# Altium PCB PCB_BAT.pcbdoc (part 1 of 2)
Units mil, origin at the board's own origin, x right, y up, seen from the top; angles counter-clockwise.
Board outline 4353.96 x 2705.18 mil, 2 copper layers (Top Layer, Bottom Layer), stack 62.206 mil thick; 127 components, 83 nets, 401 pads, 369 vias.
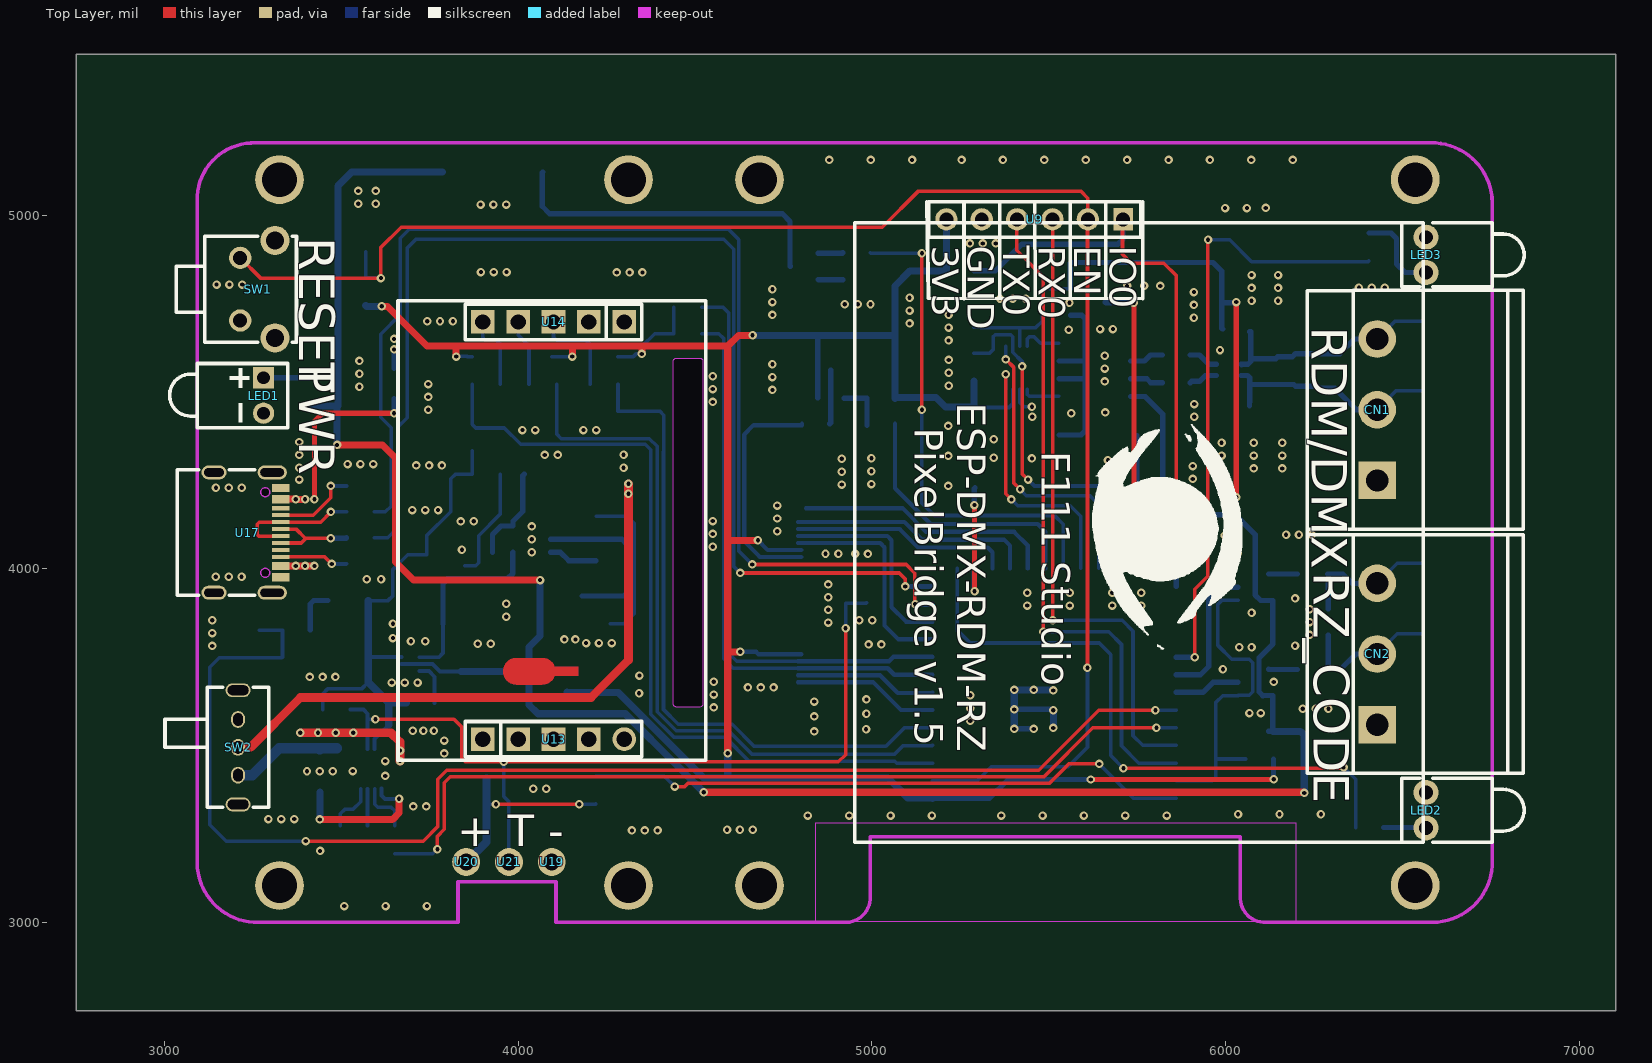
[diagram p0: Top Layer view]
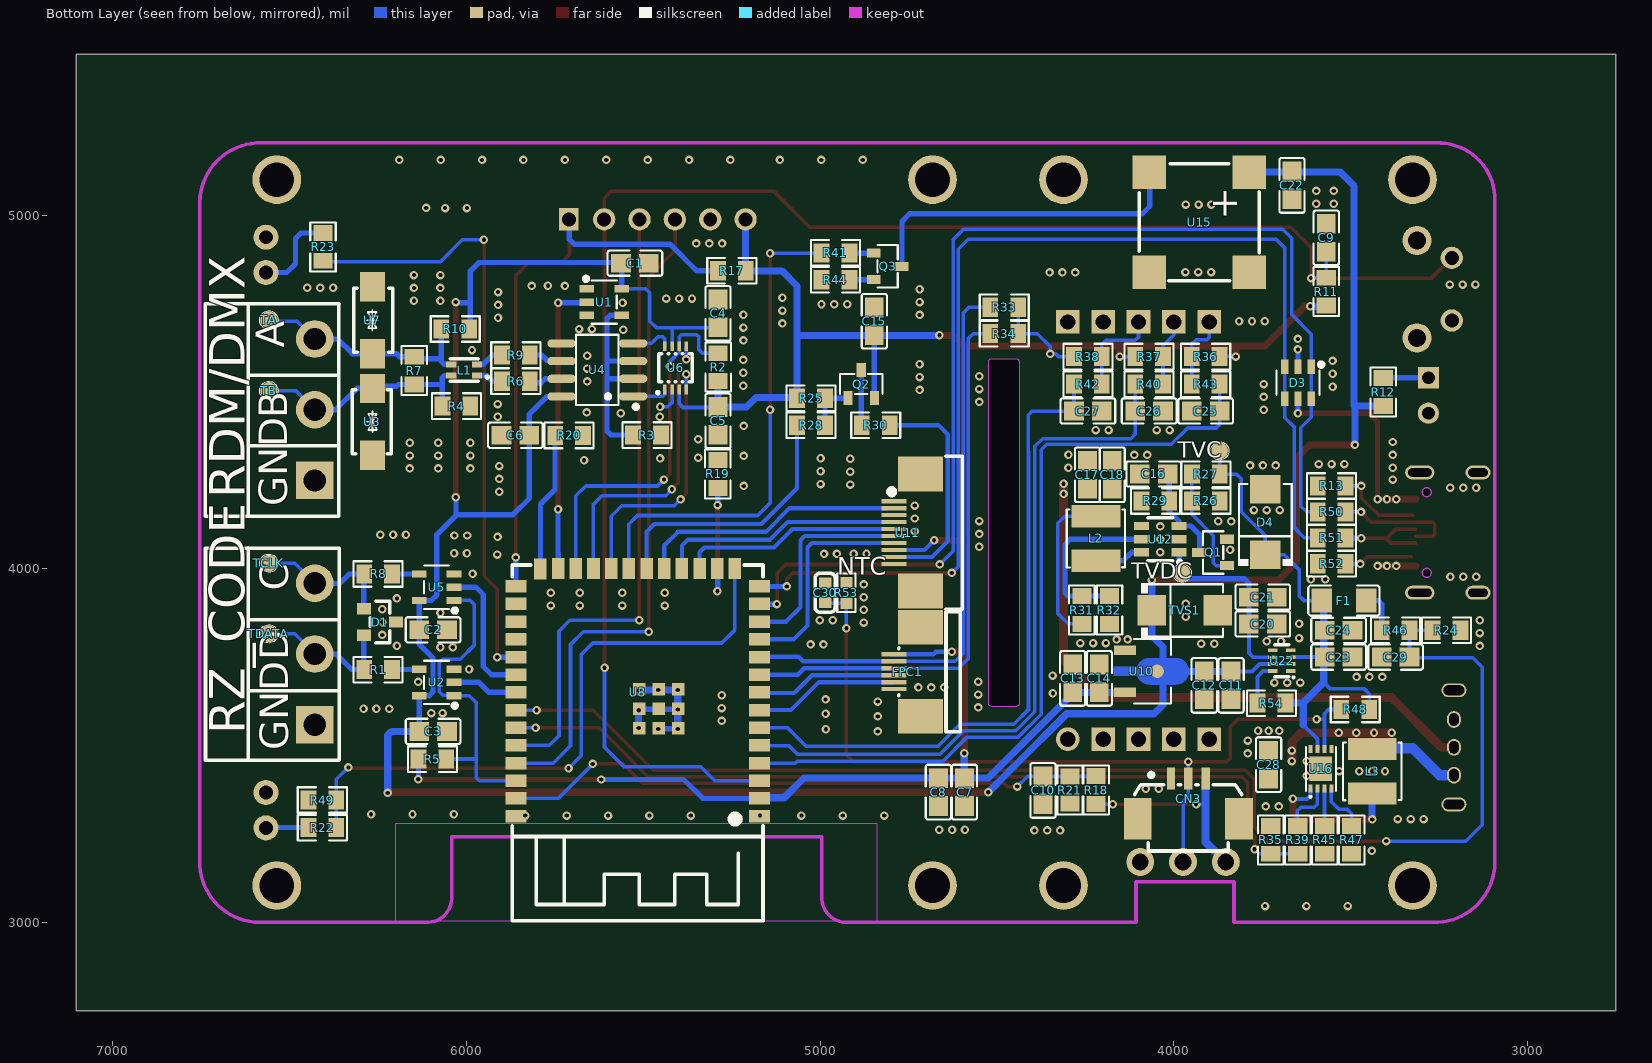
[diagram p1: Bottom Layer view, seen from below]

## Layer stack, top to bottom
Top Solder Mask Layer: solder mask 0.394, Dk 3.3
Top Layer: signal copper 1.379
Dielectric1: surface 59.449, FR4, Dk 4.5
Bottom Layer: signal copper 1.378
Bottom Solder Mask Layer: solder mask 0.394, Dk 3.3

## Board outline
7103.96,2750 2750,2750 2750,5455.18 7103.96,5455.18
cut-out: 4513.96,3610.27 ccw(c4513.96,3620.27) 4523.96,3620.27 4523.96,4584.53 ccw(c4513.96,4584.53) 4513.96,4594.53 4446.9,4594.53 ccw(c4446.9,4584.53) 4436.9,4584.53 4436.9,3620.27 ccw(c4446.9,3620.27) 4446.9,3610.27

## Design rules (kind name [scope] priority, off if disabled: settings)
BoardOutlineClearance copperThickness1oz [All] p0: genericclearance=10 ignorepadtopadclearanceinfootprint=FALSE except(0: Arc-SplitContinuation Track-SplitContinuation SMDPad-SplitContinuation THPad-SplitContinuation Via-SplitContinuation Fill-SplitContinuation Poly-SplitContinuation Region-SplitContinuation Text-SplitContinuation)
BoardOutlineClearance copperThickness2oz [All] p0: genericclearance=10 ignorepadtopadclearanceinfootprint=FALSE except(0: Arc-SplitContinuation Track-SplitContinuation SMDPad-SplitContinuation THPad-SplitContinuation Via-SplitContinuation Fill-SplitContinuation Poly-SplitContinuation Region-SplitContinuation Text-SplitContinuation)
BoardOutlineClearance otherClearance [All] p0: genericclearance=10 ignorepadtopadclearanceinfootprint=FALSE except(0: Arc-SplitContinuation Track-SplitContinuation SMDPad-SplitContinuation THPad-SplitContinuation Via-SplitContinuation Fill-SplitContinuation Poly-SplitContinuation Region-SplitContinuation Text-SplitContinuation)
Clearance copperThickness1oz [All] p1: gap=7 ignorepadtopadclearanceinfootprint=FALSE
Clearance copperThickness2oz [(InNet('VBAT'))] p1: gap=7 ignorepadtopadclearanceinfootprint=FALSE
Clearance otherClearance [All] p1: gap=7 ignorepadtopadclearanceinfootprint=FALSE
DiffPairsRouting differentialPair [All] p1: maxuncoupledlength=10 minlimit=6 maxlimit=Infinity mostfreqgap=6 toplayer_minwidth=5 toplayer_prefwidth=10 toplayer_maxwidth=100 bottomlayer_minwidth=5 bottomlayer_prefwidth=10 bottomlayer_maxwidth=100
PasteMaskExpansion pasteMaskExpansion [All] p1: expansion=0
PlaneConnect innerPlane [All] p1: planeconnectstyle=Relief reliefexpansion=20 reliefentries=4 reliefconductorwidth=10 reliefairgap=10
PolygonConnect copperRegion [All] p1: connectstyle=Relief reliefentries=4 reliefconductorwidth=10 polygonreliefangle="90 Angle" airgapwidth=10
PolygonConnect copperRegion1 [All] p1: connectstyle=Direct reliefentries=4 reliefconductorwidth=10 polygonreliefangle="90 Angle" airgapwidth=10
RoutingVias viaSize [All] p1: viastyle="Through Hole" holewidth=12.0078 minholewidth=11.811 maxholewidth=248.0314 width=12.0078 minwidth=11.811 maxwidth=248.0314
SolderMaskExpansion solderMaskExpansion [IsVia] p1: useseparateexpansions=TRUE expansion=-1000 expansionbottom=-1000
SolderMaskExpansion solderMaskExpansion [All] p2: useseparateexpansions=TRUE expansion=2 expansionbottom=2
Width copperThickness1oz [All] p1: maxlimit=100 minlimit=5 preferedwidth=10
Width copperThickness2oz [All] p1: maxlimit=100 minlimit=8 preferedwidth=10

## Components (designator, comment, footprint, x,y, rotation, side; value= is the part's Value field where it differs from the comment)
C1 "100nF" C0805 5523.87,4864.04 r0 bottom
C2 "100nF" C0805 6094.72,3827.28 r0 bottom
C3 "100nF" C0805 6094.72,3540.16 r0 bottom
C4 "100nF" C0805 5288.87,4722.04 r90 bottom
C5 "100nF" C0805 5288.87,4418.04 r90 bottom
C6 "100nF" C0805 5861.87,4377.51 r180 bottom
C7 "10uF" C0805 4591.77,3368.36 r90 bottom
C8 "100nF" C0805 4665.74,3368.36 r90 bottom
C9 "100nF" C0805 3568.87,4935.73 r270 bottom
C10 "100nF" C0805 4369.81,3373.04 r90 bottom
C11 "22uF" C0805 3837.87,3670.04 r90 bottom
C12 "100nF" C0805 3913.87,3670.04 r90 bottom
C13 "22uF" C0805 4285.87,3690.04 r270 bottom
C14 "100nF" C0805 4210.66,3689.98 r270 bottom
C15 "22uF" C0805 4846.87,4700.04 r270 bottom
C16 "100nF" C0805 4056.87,4268.04 r180 bottom
C17 "10uF" C0805 4244.23,4265.69 r90 bottom
C18 "22uF" C0805 4174.23,4265.69 r90 bottom
C20 "22uF" C0805 3748.23,3843.69 r180 bottom
C21 "22uF" C0805 3748.23,3919.69 r180 bottom
C22 "100nF" C0805 3665.87,5084.04 r90 bottom
C23 "10uF" C0805 3533.87,3750.04 r180 bottom
C24 "100nF" C0805 3533.87,3826.04 r0 bottom
C25 "10nF" C0805 3909.87,4446.04 r180 bottom
C26 "10nF" C0805 4069.87,4446.04 r0 bottom
C27 "10nF" C0805 4242.87,4446.04 r0 bottom
C28 "10uF" C0805 3731.87,3446.04 r90 bottom
C29 "100nF" C0805 3372.87,3750.04 r180 bottom
C30 "100nF" C0603 4985.87,3932.04 r270 bottom
CN1 "WJ2EDGRC-5.08-03P-14-00A" CONN-TH_3P-P5.08_WJ2EDGRC-5.08-3P 6428.96,4449.72 r90 top locked
CN2 "WJ2EDGRC-5.08-03P-14-00A" CONN-TH_3P-P5.08_WJ2EDGRC-5.08-3P 6428.96,3759.01 r90 top locked
CN3 "HCZZ0001-3" CONN-SMD_3P-P1.25_HCZZ0001-3 3958.87,3350.04 r180 bottom locked
D1 "PESD5V0S2BT,215" SOT-23_L2.9-W1.3-P1.90-LS2.4-BR 6245.32,3849.37 r0 bottom
D3 "USBLC6-2SC6" SOT-23-6_L2.9-W1.6-P0.95-LS2.8-BL 3648.87,4526.04 r0 bottom
D4 "SMBJ6.0A" SMB_L4.5-W3.7-LS5.4-RD 3740.87,4132.04 r90 bottom
F1 "1206L300SL16ARG" L1206 3518.87,3910.04 r180 bottom
FPC1 "05B20L06P" FPC-SMD_6P-P0.50_05B20L06P 4753.74,3708.82 r270 bottom
L1 "SMW2012B900DTE" FILTER-SMD_4P-L2.0-W1.2-BL 6006.87,4562.04 r90 bottom
L2 "2.2uH" IND-SMD_L4.0-W4.0 4220.23,4085.69 r90 bottom
L3 "2.2uH" IND-SMD_L4.0-W4.0 3439.14,3427.27 r270 bottom
LED1 "MHK1375CRBTD" LED-TH_MHK1375CRBTD 3279.83,4489.84 r270 top locked
LED2 "MHK1375CGBTD" LED-TH_MHK1375CGBTD 6567.51,3317.28 r90 top locked
LED3 "MHK1375CGBTD" LED-TH_MHK1375CGBTD 6567.51,4887.54 r90 top locked
Q1 "NTR4503NT1G" SOT-23-3_L2.9-W1.3-P1.90-LS2.4-BR 3888.87,4046.04 r180 bottom
Q2 "AO3401A" SOT-23-3_L2.9-W1.3-P1.90-LS2.4-BR 4883.87,4522.34 r270 bottom
Q3 "S8050" SOT-23-3_L2.9-W1.3-P1.90-LS2.4-BR 4809.09,4855.19 r0 bottom
R1 "33Ω" R0805 6249.99,3714.84 r180 bottom
R2 "10kΩ" R0805 5288.6,4570.2 r270 bottom
R3 "10kΩ" R0805 5489.87,4378.04 r180 bottom
R4 "1kΩ" R0805 6028.87,4460.04 r180 bottom
R5 "10kΩ" R0805 6096.72,3461.85 r0 bottom
R6 "0Ω" R0805 5860.73,4530.02 r180 bottom
R7 "120Ω" R0805 6147.86,4560.16 r270 bottom
R8 "33Ω" R0805 6249.99,3985.25 r180 bottom
R9 "0Ω" R0805 5860.73,4604.33 r180 bottom
R10 "1kΩ" R0805 6031.87,4678.04 r0 bottom
R11 "10kΩ" R0805 3568.87,4783.73 r270 bottom
R12 "5.1kΩ" R0805 3407.87,4499.83 r270 bottom
R13 "5.1kΩ" R0805 3553.87,4234.04 r0 bottom
R17 "10kΩ" R0805 5249.87,4842.57 r180 bottom
R18 "150kΩ" R0805 4219.59,3374.32 r270 bottom
R19 "10kΩ" R0805 5289.4,4268.04 r270 bottom
R20 "10kΩ" R0805 5709.87,4376.98 r0 bottom
R21 "100kΩ" R0805_NEW 4293.59,3374.32 r90 bottom
R22 "1kΩ" R0805 6407.87,3268.04 r180 bottom
R23 "1kΩ" R0805 6405.87,4910.04 r270 bottom
R24 "150kΩ" R0805 3228.87,3826.04 r0 bottom
R25 "100kΩ" R0805 5025.87,4482.04 r0 bottom
R26 "100kΩ" R0805 3909.23,4191.69 r180 bottom
R27 "10kΩ" R0805 3909.23,4267.69 r0 bottom
R28 "100Ω" R0805 5025.87,4406.04 r180 bottom
R29 "100kΩ" R0805 4052.23,4191.69 r180 bottom
R30 "33Ω" R0805 4842.87,4406.04 r0 bottom
R31 "150kΩ" R0805 4259.89,3883.35 r270 bottom
R32 "36kΩ" R0805 4181.89,3883.35 r90 bottom
R33 "4.7kΩ" R0805 4479.47,4739.63 r180 bottom
R34 "4.7kΩ" R0805 4479.47,4664.97 r180 bottom
R35 "33kΩ" R0805 3725.87,3233.27 r90 bottom
R36 "4.7kΩ" R0805 3909.87,4600.04 r180 bottom
R37 "4.7kΩ" R0805 4069.87,4600.04 r0 bottom
R38 "4.7kΩ" R0805 4242.87,4600.04 r0 bottom
R39 "22kΩ" R0805 3649.63,3233.27 r270 bottom
R40 "100Ω" R0805 4069.87,4522.04 r180 bottom
R41 "1kΩ" R0805 4956.78,4893.35 r180 bottom
R42 "100Ω" R0805 4242.87,4522.04 r0 bottom
R43 "100Ω" R0805 3909.87,4522.04 r0 bottom
R44 "100Ω" R0805 4956.78,4817.04 r180 bottom
R45 "0Ω" R0805 3573.38,3233.27 r270 bottom
R46 "100kΩ" R0805 3372.87,3826.04 r0 bottom
R47 "10kΩ" R0805 3497.14,3233.27 r270 bottom
R48 "15kΩ" R0805 3486.87,3602.04 r0 bottom
R49 "10kΩ" R0805 6407.87,3346.04 r180 bottom
R50 "0Ω" R0805 3553.87,4160.7 r0 bottom
R51 "0Ω" R0805 3553.87,4087.37 r180 bottom
R52 "5.1kΩ" R0805 3553.87,4014.04 r0 bottom
R53 "SDNT1608X103F3950FTF" R0603 4925.87,3931.84 r270 bottom
R54 "100kΩ" R0805 3723.87,3620.04 r180 bottom
SW1 "KH-6X6X6H-ZJ" SW-TH_KH-6X6X6H-ZJ-A 3263.1,4790.64 r270 top
SW2 "SK-12D02-G030" SW-TH_SK-12D02VG3 3207.87,3495.04 r270 top
TA "" 测试点 6561.87,4703.6 r180 bottom
TB "" 测试点 6561.87,4504.04 r180 bottom
TCLK "" 测试点 6561.87,4015.78 r180 bottom
TDATA "" 测试点 6561.87,3815.97 r180 bottom
TVC "" 测试点 3873.06,4333.41 r180 bottom
TVDC "" 测试点 3979.71,3987.97 r180 bottom
TVS1 "SMBJ5.0A" SMB_L4.6-W3.6-LS5.3-RD 3968.87,3882.04 r180 bottom
U1 "SN74AHCT1G125DBVR(UMW)" SOT-23-5_L3.0-W1.5-P0.95-LS2.8-BL 5610.87,4754.04 r270 bottom
U2 "SN74AHCT1G125DBVR(UMW)" SOT-23-5_L3.0-W1.5-P0.95-LS2.8-BL 6084.68,3678.7 r90 bottom
U3 "SMAJ12CA" SMA_L4.3-W2.7-LS5.1-BI 6266.48,4415.59 r90 bottom
U4 "THVD1450DR" SOIC-8_L4.9-W3.9-P1.27-LS6.0-BL 5630.33,4562.33 r90 bottom
U5 "SN74AHCT1G125DBVR(UMW)" SOT-23-5_L3.0-W1.5-P0.95-LS2.8-BL 6084.68,3947.75 r90 bottom
U6 "TXS0102DCUR" VSON8_L2.0-W2.3-P0.50-LS3.1-BL 5408.96,4568.19 r180 bottom
U7 "SMAJ12CA" SMA_L4.3-W2.7-LS5.1-BI 6266.32,4702.72 r270 bottom
U8 "2.4GHz" WIRELM-SMD_ESP32-S3-WROOM-1 5516.04,3650.59 r0 bottom locked
U9 "LAIL-PZ2.54-6P-L" CONN-TH_LAIL-PZ2.54-6P-L 5460.87,4988.04 r180 top
U10 "AP7365-33YRG-13" SOT-89-3_L4.5-W2.5-P1.50-LS4.2-BR 4084.87,3710.04 r0 bottom
U11 "HC-FPC-0.5-10P-CSH20" FPC-SMD_10P-P0.50_HC-FPC-0.5-10P-CSH20 4753.74,4102.4 r90 bottom
U12 "ETA1039S2G" SOT-23-6_L2.9-W1.6-P0.95-LS2.8-BR 4038.23,4083.69 r180 bottom
U13 "2541WV-05P" HDR-TH_5P-P2.54-V-M#1 4099.87,3518.04 r0 top locked
U14 "2541WV-05P" HDR-TH_5P-P2.54-V-M#2 4099.87,4698.04 r180 top locked
U15 "2.731kHz" BUZ-SMD_4P-L8.5-W8.5-P8.50-TL-A 3927.87,4980.04 r270 bottom
U16 "SGM41524YTDC8G/TR" DFN-8_L3.0-W2.0-P0.50-TL-EP-1 3584.02,3434.07 r90 bottom
U17 "GT-USB-7010ASV" USB-C-SMD_G-SWITCH_GT-USB-7010ASV 3234.27,4102.34 r270 top
U19 "电池焊盘" 电池焊盘 4094.87,3170.8 r0 top
U20 "电池焊盘" 电池焊盘 3852.87,3170.8 r0 top
U21 "电池焊盘" 电池焊盘 3973.87,3170.8 r0 top
U22 "LM66200DRLR" SOT-583-8_L2.1-W1.2-P0.50-LS1.6-BL 3694.87,3740.04 r90 bottom

## Footprints (in the part's own frame and the unit in brackets; to place one, negate y for a bottom-side part, rotate by r counter-clockwise, add the part's x,y. Pads: shape width x height; smd on the part's side, far side on the other; paste and mask are expansions set on the pad)
BUZ-SMD_4P-L8.5-W8.5-P8.50-TL-A [mil]
  rect 94.49x94.49 smd: 1(-141.73,141.72) 2(-141.73,-141.72) 3(141.72,-141.72) 4(141.73,141.72)
  silkscreen extent -165,-169 165,169
C0603 [mm]
  rect 0.8x0.9 smd: 1(-0.7,0) 2(0.7,0)
  silkscreen extent -1.39,-0.71 1.39,0.71
C0805 [mm]
  rect 1.41x1.35 smd paste-100 mask+0.051: 1(-1,0) 2(1,0)
  silkscreen extent -1.96,-0.9 1.96,0.9
CONN-SMD_3P-P1.25_HCZZ0001-3 [mm]
  rect 0.6x1.6 smd paste+0 mask+0.05: 1(-1.25,1.45) 2(0,1.45) 3(1.25,1.45)
  rect 2x3 smd paste+0 mask+0.05: 4(3.63,-1.45) 5(-3.63,-1.45)
  silkscreen extent -3.87,-3.76 3.84,1.85
CONN-TH_3P-P5.08_WJ2EDGRC-5.08-3P [mm]
  rect 2.7x2.7 hole 1.6: 1(-5.08,0)
  round 2.7 hole 1.6: 2(0,0) 3(5.08,0)
  silkscreen extent -8.57,-10.5 8.57,1.7
CONN-TH_LAIL-PZ2.54-6P-L [mm]
  rect 1.4x1.6 hole 1 paste+0 mask+0.05: 1(-6.35,0)
  round 1.6 hole 1 paste+0 mask+0.05: 2(-3.81,0) 3(-1.27,0) 4(1.27,0) 5(3.81,0) 6(6.35,0)
  silkscreen extent -7.62,-1.27 7.62,1.27
DFN-8_L3.0-W2.0-P0.50-TL-EP-1 [mm]
  rect 0.585x0.28 smd: 1(-1.418,0.75) 2(-1.418,0.25) 3(-1.418,-0.25) 4(-1.418,-0.75) 5(1.418,-0.75) 6(1.418,-0.25) 7(1.418,0.25) 8(1.418,0.75)
  rect 1.75x1.63 smd: 9(0,0)
  silkscreen extent -2.08,-1.08 1.58,1.08
FILTER-SMD_4P-L2.0-W1.2-BL [mm]
  rect 0.448x0.75 smd: 1(-0.4,-0.925) 2(0.4,-0.925) 3(0.4,0.925) 4(-0.4,0.925)
  silkscreen extent -0.8,-1.75 0.8,1
FPC-SMD_6P-P0.50_05B20L06P [mm]
  rect 0.3x1.8 smd paste+0 mask+0.05: 1(-1.25,-0.95) 2(-0.75,-0.95) 3(-0.25,-0.95) 4(0.25,-0.95) 5(0.75,-0.95) 6(1.25,-0.95)
  rect 2.5x3.2 smd paste+0 mask+0.05: 7(-3.2,0.95) 8(3.2,0.95)
  silkscreen extent -4.3,-0.6 4.3,3.8
FPC-SMD_10P-P0.50_HC-FPC-0.5-10P-CSH20 [mm]
  rect 0.3x1.8 smd paste+0 mask+0.05: 1(2.25,0.95) 2(1.75,0.95) 3(1.25,0.95) 4(0.75,0.95) 5(0.25,0.95) 6(-0.25,0.95) 7(-0.75,0.95) 8(-1.25,0.95) 9(-1.75,0.95) 10(-2.25,0.95)
  rect 2.5x3.2 smd paste+0 mask+0.05: 11(-4.2,-0.95) 12(4.2,-0.95)
  silkscreen extent -5.49,-3.94 5.49,1.32
HDR-TH_5P-P2.54-V-M#1 [mm]
  rect 1.7x1.7 hole 1.1: 1(-5.08,0) 2(-2.54,0) 3(0,0) 4(2.54,0)
  round 1.7 hole 1.1: 5(5.08,0)
  silkscreen extent -6.35,-1.27 6.35,1.27
HDR-TH_5P-P2.54-V-M#2 [mm]
  rect 1.7x1.7 hole 1.1: 1(-5.08,0) 2(-2.54,0) 3(0,0) 4(2.54,0) 5(5.08,0)
  silkscreen extent -6.35,-1.27 6.35,1.27
IND-SMD_L4.0-W4.0 [mm]
  rect 1.6x3.5 smd: 1(-1.6,0) 2(1.6,0)
  silkscreen extent -2.08,-2.1 2.08,2.1
L1206 [mm]
  rect 1.485x1.728 smd paste-100 mask+0.051: 1(-1.593,0) 2(1.593,0)
  silkscreen extent -2.56,-1.09 2.56,1.09
LED-TH_MHK1375CGBTD [mm]
  round 1.8 hole 1: 1(-1.27,0) 2(1.27,0)
  silkscreen extent -2.3,-7.04 2.3,1.75
LED-TH_MHK1375CRBTD [mil]
  rect 60x60 hole 36 paste+0 mask+1.97: 1(-50,0)
  round 60 hole 36 paste+0 mask+1.97: 2(50,0)
  silkscreen extent -91,-266 91,69
R0603 [mil]
  rect 31.75x34.02 smd paste-3937.01 mask+2: 1(-29.66,0) 2(29.66,0)
  silkscreen extent -55,-26 55,26
R0805 [mm]
  rect 1.133x1.377 smd paste-100 mask+0.051: 1(-1,0) 2(1,0)
  silkscreen extent -1.76,-0.92 1.76,0.92
R0805_NEW [mil]
  rect 44.59x54.21 smd paste-3937.01 mask+2: 1(-38.04,0) 2(38.04,0)
  silkscreen extent -69,-36 69,36
SMA_L4.3-W2.7-LS5.1-BI [mm]
  rect 2.1x1.8 smd: 1(-2.4,0) 2(2.4,0)
  silkscreen extent -2.3,-1.35 2.3,1.45
SMB_L4.5-W3.7-LS5.4-RD [mil]
  rect 80.61x86.31 smd: 1(-92.94,0) 2(92.94,0)
  silkscreen extent -123,-77 108,77
SMB_L4.6-W3.6-LS5.3-RD [mil]
  rect 80.61x86.31 smd: 1(-92.94,0) 2(92.94,0)
  silkscreen extent -123,-77 108,77
SOIC-8_L4.9-W3.9-P1.27-LS6.0-BL [mm]
  oval 0.588x2.045 smd: 1(-1.905,-2.57) 2(-0.635,-2.57) 3(0.635,-2.57) 4(1.905,-2.57) 5(1.905,2.57) 6(0.635,2.57) 7(-0.635,2.57) 8(-1.905,2.57)
  silkscreen extent -2.8,-2.92 2.53,1.52
SOT-23-3_L2.9-W1.3-P1.90-LS2.4-BR [mm]
  rect 1x0.65 smd: 1(1,-0.95) 2(1,0.95) 3(-1,0)
  silkscreen extent -0.73,-1.53 0.73,1.53
SOT-23-5_L3.0-W1.5-P0.95-LS2.8-BL [mm]
  rect 0.532x1.045 smd: 1(-0.95,-1.25) 2(0,-1.25) 3(0.95,-1.25) 4(0.95,1.25) 5(-0.95,1.25)
  silkscreen extent -1.82,-1.45 1.55,0.9
SOT-23-6_L2.9-W1.6-P0.95-LS2.8-BL [mil]
  rect 20.95x42.2 smd: 1(-37.4,-45.24) 2(0,-45.24) 3(37.4,-45.24) 4(37.4,45.24) 5(0,45.24) 6(-37.4,45.24)
  silkscreen extent -72,-57 61,35
SOT-23-6_L2.9-W1.6-P0.95-LS2.8-BR [mm]
  rect 1.1x0.6 smd paste+0 mask+0.051: 1(1.35,-0.95) 2(1.35,0) 3(1.35,0.95) 4(-1.35,0.95) 5(-1.35,0) 6(-1.35,-0.95)
  silkscreen extent -0.9,-1.78 1.52,1.55
SOT-23_L2.9-W1.3-P1.90-LS2.4-BR [mm]
  rect 1x0.8 smd: 1(1.15,-0.95) 2(1.15,0.95) 3(-1.15,0)
  silkscreen extent -0.7,-1.5 0.7,1.5
SOT-89-3_L4.5-W2.5-P1.50-LS4.2-BR [mm]
  rect 1.575x0.672 smd: 1(1.356,-1.5) 3(1.356,1.5)
  round 0.95 smd: 2(-0.966,0)
  Top Layer region: -2.283,0.95 -0.429,0.95 -0.384,0.949 -0.34,0.946 -0.296,0.94 -0.252,0.933 -0.208,0.924 -0.165,0.912 -0.123,0.899 -0.081,0.884 -0.04,0.866 0,0.847 0.04,0.826 0.078,0.803 0.115,0.779 0.151,0.752 0.185,0.724 0.219,0.695 0.251,0.664 0.281,0.631 0.31,0.597 0.337,0.562 0.362,0.525 0.386,0.488 0.408,0.449 0.428,0.409 0.447,0.33 2.144,0.33 2.144,-0.33 0.447,-0.33 0.428,-0.409 0.408,-0.449 0.386,-0.488 0.362,-0.526 0.337,-0.562 0.31,-0.597 0.281,-0.631 0.251,-0.664 0.219,-0.695 0.185,-0.725 0.151,-0.753 0.115,-0.779 0.078,-0.804 0.04,-0.827 0,-0.848 -0.04,-0.867 -0.081,-0.884 -0.123,-0.899 -0.165,-0.913 -0.208,-0.924 -0.252,-0.934 -0.296,-0.941 -0.34,-0.946 -0.384,-0.949 -0.429,-0.95 -2.283,-0.95 -2.328,-0.949 -2.372,-0.946 -2.416,-0.941 -2.46,-0.934 -2.504,-0.924 -2.547,-0.913 -2.589,-0.899 -2.631,-0.884 -2.672,-0.867 -2.713,-0.848 -2.752,-0.827 -2.79,-0.804 -2.827,-0.779 -2.863,-0.753 -2.898,-0.725 -2.931,-0.695 -2.963,-0.664 -2.993,-0.631 -3.022,-0.597 -3.049,-0.562 -3.075,-0.526 -3.098,-0.488 -3.12,-0.449 -3.141,-0.409 -3.159,-0.369 -3.175,-0.327 -3.189,-0.285 -3.202,-0.242 -3.212,-0.199 -3.22,-0.155 -3.227,-0.111 -3.231,-0.067 -3.233,-0.022 -3.233,0.022 -3.231,0.067 -3.227,0.111 -3.22,0.155 -3.212,0.199 -3.202,0.242 -3.189,0.285 -3.175,0.327 -3.159,0.369 -3.141,0.409 -3.12,0.449 -3.098,0.488 -3.075,0.525 -3.049,0.562 -3.022,0.597 -2.993,0.631 -2.963,0.664 -2.931,0.695 -2.898,0.724 -2.863,0.752 -2.827,0.779 -2.79,0.803 -2.752,0.826 -2.713,0.847 -2.672,0.866 -2.631,0.884 -2.589,0.899 -2.547,0.912 -2.504,0.924 -2.46,0.933 -2.416,0.94 -2.372,0.946 -2.328,0.949
  Bottom Layer region: -2.283,0.95 -0.429,0.95 -0.384,0.949 -0.34,0.946 -0.296,0.94 -0.252,0.933 -0.208,0.924 -0.165,0.912 -0.123,0.899 -0.081,0.884 -0.04,0.866 0,0.847 0.04,0.826 0.078,0.803 0.115,0.779 0.151,0.752 0.185,0.724 0.219,0.695 0.251,0.664 0.281,0.631 0.31,0.597 0.337,0.562 0.362,0.525 0.386,0.488 0.408,0.449 0.428,0.409 0.447,0.33 2.144,0.33 2.144,-0.33 0.447,-0.33 0.428,-0.409 0.408,-0.449 0.386,-0.488 0.362,-0.526 0.337,-0.562 0.31,-0.597 0.281,-0.631 0.251,-0.664 0.219,-0.695 0.185,-0.725 0.151,-0.753 0.115,-0.779 0.078,-0.804 0.04,-0.827 0,-0.848 -0.04,-0.867 -0.081,-0.884 -0.123,-0.899 -0.165,-0.913 -0.208,-0.924 -0.252,-0.934 -0.296,-0.941 -0.34,-0.946 -0.384,-0.949 -0.429,-0.95 -2.283,-0.95 -2.328,-0.949 -2.372,-0.946 -2.416,-0.941 -2.46,-0.934 -2.504,-0.924 -2.547,-0.913 -2.589,-0.899 -2.631,-0.884 -2.672,-0.867 -2.713,-0.848 -2.752,-0.827 -2.79,-0.804 -2.827,-0.779 -2.863,-0.753 -2.898,-0.725 -2.931,-0.695 -2.963,-0.664 -2.993,-0.631 -3.022,-0.597 -3.049,-0.562 -3.075,-0.526 -3.098,-0.488 -3.12,-0.449 -3.141,-0.409 -3.159,-0.369 -3.175,-0.327 -3.189,-0.285 -3.202,-0.242 -3.212,-0.199 -3.22,-0.155 -3.227,-0.111 -3.231,-0.067 -3.233,-0.022 -3.233,0.022 -3.231,0.067 -3.227,0.111 -3.22,0.155 -3.212,0.199 -3.202,0.242 -3.189,0.285 -3.175,0.327 -3.159,0.369 -3.141,0.409 -3.12,0.449 -3.098,0.488 -3.075,0.525 -3.049,0.562 -3.022,0.597 -2.993,0.631 -2.963,0.664 -2.931,0.695 -2.898,0.724 -2.863,0.752 -2.827,0.779 -2.79,0.803 -2.752,0.826 -2.713,0.847 -2.672,0.866 -2.631,0.884 -2.589,0.899 -2.547,0.912 -2.504,0.924 -2.46,0.933 -2.416,0.94 -2.372,0.946 -2.328,0.949
  Multi-Layer region: -2.283,0.95 -0.429,0.95 -0.384,0.949 -0.34,0.946 -0.296,0.94 -0.252,0.933 -0.208,0.924 -0.165,0.912 -0.123,0.899 -0.081,0.884 -0.04,0.866 0,0.847 0.04,0.826 0.078,0.803 0.115,0.779 0.151,0.752 0.185,0.724 0.219,0.695 0.251,0.664 0.281,0.631 0.31,0.597 0.337,0.562 0.362,0.525 0.386,0.488 0.408,0.449 0.428,0.409 0.447,0.33 2.144,0.33 2.144,-0.33 0.447,-0.33 0.428,-0.409 0.408,-0.449 0.386,-0.488 0.362,-0.526 0.337,-0.562 0.31,-0.597 0.281,-0.631 0.251,-0.664 0.219,-0.695 0.185,-0.725 0.151,-0.753 0.115,-0.779 0.078,-0.804 0.04,-0.827 0,-0.848 -0.04,-0.867 -0.081,-0.884 -0.123,-0.899 -0.165,-0.913 -0.208,-0.924 -0.252,-0.934 -0.296,-0.941 -0.34,-0.946 -0.384,-0.949 -0.429,-0.95 -2.283,-0.95 -2.328,-0.949 -2.372,-0.946 -2.416,-0.941 -2.46,-0.934 -2.504,-0.924 -2.547,-0.913 -2.589,-0.899 -2.631,-0.884 -2.672,-0.867 -2.713,-0.848 -2.752,-0.827 -2.79,-0.804 -2.827,-0.779 -2.863,-0.753 -2.898,-0.725 -2.931,-0.695 -2.963,-0.664 -2.993,-0.631 -3.022,-0.597 -3.049,-0.562 -3.075,-0.526 -3.098,-0.488 -3.12,-0.449 -3.141,-0.409 -3.159,-0.369 -3.175,-0.327 -3.189,-0.285 -3.202,-0.242 -3.212,-0.199 -3.22,-0.155 -3.227,-0.111 -3.231,-0.067 -3.233,-0.022 -3.233,0.022 -3.231,0.067 -3.227,0.111 -3.22,0.155 -3.212,0.199 -3.202,0.242 -3.189,0.285 -3.175,0.327 -3.159,0.369 -3.141,0.409 -3.12,0.449 -3.098,0.488 -3.075,0.525 -3.049,0.562 -3.022,0.597 -2.993,0.631 -2.963,0.664 -2.931,0.695 -2.898,0.724 -2.863,0.752 -2.827,0.779 -2.79,0.803 -2.752,0.826 -2.713,0.847 -2.672,0.866 -2.631,0.884 -2.589,0.899 -2.547,0.912 -2.504,0.924 -2.46,0.933 -2.416,0.94 -2.372,0.946 -2.328,0.949
  silkscreen extent -1.95,-2.33 0.7,2.33
SOT-583-8_L2.1-W1.2-P0.50-LS1.6-BL [mm]
  rect 0.28x0.68 smd: 1(-0.75,-0.64) 2(-0.25,-0.64) 3(0.25,-0.64) 4(0.75,-0.64) 5(0.75,0.64) 6(0.25,0.64) 7(-0.25,0.64) 8(-0.75,0.64)
  silkscreen extent -1.27,-0.93 1.14,0.51
SW-TH_KH-6X6X6H-ZJ-A [mm]
  round 1.6 hole 1 paste+0 mask+0.05: 1(-2.25,-1.25) 2(2.25,-1.25)
  round 2.1 hole 1.3 copper offset 0,0 paste+0 mask+0.05: 3(-3.5,1.25) 4(3.5,1.25)
  silkscreen extent -3.81,-5.84 3.81,2.79
SW-TH_SK-12D02VG3 [mm]
  oval 1.2x1 hole 0.7 slot 0.9 at 0 deg copper offset 0.001,0 paste+0 mask+0.051: 1(-2,0)
  oval 1.2x1 hole 0.7 slot 0.9 at 0 deg paste+0 mask+0.051: 2(0,0)
  oval 1.2x1 hole 0.7 slot 0.9 at 0 deg copper offset -0.001,0 paste+0 mask+0.051: 3(2,0)
  oval 1x1.8 hole 0.7 slot 1.5 at 90 deg copper offset 0,0 paste+0 mask+0.051: 4(4.1,0) 5(-4.1,0)
  silkscreen extent -4.3,-5.25 4.3,2.2
USB-C-SMD_G-SWITCH_GT-USB-7010ASV [mm]
  oval 1x2.1 hole 0.6 slot 1.7 at 90 deg paste+0 mask+0.05: 1(-4.32,1.78) 2(4.32,1.78)
  oval 1x1.8 hole 0.6 slot 1.4 at 90 deg paste+0 mask+0.05: 3(4.32,-2.4) 4(-4.32,-2.4)
  rect 0.6x1.24 smd paste-100 mask+0.05: A1B12(-3.2,2.4) A4B9(-2.4,2.4) B1A12(3.2,2.4) B4A9(2.4,2.4)
  rect 0.3x1.24 smd paste-100 mask+0.05: A5(-1.25,2.4) A6(-0.25,2.4) A7(0.25,2.4) A8(1.25,2.4) B5(1.75,2.4) B6(0.75,2.4) B7(-0.75,2.4) B8(-1.75,2.4)
  Board Outline Layer circle w0.003: c2.89,1.28 r0.325
  Board Outline Layer circle w0.003: c-2.9,1.28 r0.325
  Board Outline Layer region: 2.89,1.605 3.031,1.573 3.144,1.483 3.207,1.352 3.207,1.208 3.144,1.078 3.031,0.987 2.89,0.955 2.89,0.955 2.749,0.987 2.636,1.078 2.573,1.208 2.573,1.352 2.636,1.483 2.749,1.573 2.89,1.605
  Board Outline Layer region: 2.89,1.605 2.968,1.596 3.041,1.568 3.105,1.523 3.157,1.465 3.194,1.395 3.213,1.319 3.213,1.241 3.194,1.165 3.157,1.096 3.105,1.037 3.041,0.992 2.968,0.965 2.89,0.955 2.812,0.965 2.739,0.992 2.674,1.037 2.623,1.096 2.586,1.165 2.567,1.241 2.567,1.319 2.586,1.395 2.623,1.465 2.674,1.523 2.739,1.568 2.812,1.596
  Board Outline Layer region: -2.9,1.605 -2.759,1.573 -2.646,1.483 -2.583,1.352 -2.583,1.208 -2.646,1.078 -2.759,0.987 -2.9,0.955 -2.9,0.955 -3.041,0.987 -3.154,1.078 -3.217,1.208 -3.217,1.352 -3.154,1.483 -3.041,1.573 -2.9,1.605
  Board Outline Layer region: -2.9,1.605 -2.822,1.596 -2.749,1.568 -2.684,1.523 -2.632,1.465 -2.596,1.395 -2.577,1.319 -2.577,1.241 -2.596,1.165 -2.632,1.096 -2.684,1.037 -2.749,0.992 -2.822,0.965 -2.9,0.955 -2.978,0.965 -3.051,0.992 -3.115,1.037 -3.167,1.096 -3.204,1.165 -3.223,1.241 -3.223,1.319 -3.204,1.395 -3.167,1.465 -3.115,1.523 -3.051,1.568 -2.978,1.596
  Multi-Layer board cut-out: 2.89,1.605 3.031,1.573 3.144,1.483 3.207,1.352 3.207,1.208 3.144,1.078 3.031,0.987 2.89,0.955 2.89,0.955 2.749,0.987 2.636,1.078 2.573,1.208 2.573,1.352 2.636,1.483 2.749,1.573 2.89,1.605
  Multi-Layer board cut-out: -2.9,1.605 -2.759,1.573 -2.646,1.483 -2.583,1.352 -2.583,1.208 -2.646,1.078 -2.759,0.987 -2.9,0.955 -2.9,0.955 -3.041,0.987 -3.154,1.078 -3.217,1.208 -3.217,1.352 -3.154,1.483 -3.041,1.573 -2.9,1.605
  silkscreen extent -4.5,-5.03 4.5,0.52
VSON8_L2.0-W2.3-P0.50-LS3.1-BL [mil]
  rect 9.84x27.56 smd: 1(-30,-61.02) 2(-10,-61.02) 3(10,-61.02) 4(30,-61.02) 5(30,61.03) 6(10,61.03) 7(-10,61.03) 8(-30,61.03)
  silkscreen extent -54,-74 47,39
WIRELM-SMD_ESP32-S3-WROOM-1 [mm]
  rect 1.5x0.9 smd paste+0 mask+0.05: 1(-8.75,8.895) 2(-8.75,7.625) 3(-8.75,6.355) 4(-8.75,5.085) 5(-8.75,3.815) 6(-8.75,2.545) 7(-8.75,1.275) 8(-8.75,0.005) 9(-8.75,-1.265) 10(-8.75,-2.535) 11(-8.75,-3.805) 12(-8.75,-5.075) 13(-8.75,-6.345) 14(-8.75,-7.615) 27(8.75,-7.615) 28(8.75,-6.345) 29(8.75,-5.075) 30(8.75,-3.805) 31(8.75,-2.535) 32(8.75,-1.265) 33(8.75,0.005) 34(8.75,1.275) 35(8.75,2.545) 36(8.75,3.815) 37(8.75,5.085) 38(8.75,6.355) 39(8.75,7.625) 40(8.75,8.895)
  rect 0.9x1.5 smd paste+0 mask+0.05: 15(-6.985,-8.895) 16(-5.715,-8.895) 17(-4.445,-8.895) 18(-3.175,-8.895) 19(-1.905,-8.895) 20(-0.635,-8.895) 21(0.635,-8.895) 22(1.905,-8.895) 23(3.175,-8.895) 24(4.445,-8.895) 25(5.715,-8.895) 26(6.985,-8.865)
  rect 0.9x0.9 smd: 41(-2.9,-0.225) 41(-2.9,1.175) 41(-2.9,2.575) 41(-1.5,-0.225) 41(-1.5,1.175) 41(-1.5,2.575) 41(-0.1,-0.225) 41(-0.1,1.175) 41(-0.1,2.575)
  silkscreen extent -9,-9.14 9.02,16.39
测试点 [mm]
  round 1.2 smd paste+0 mask+0.051: 1(0.069,-0.001)
  silkscreen extent -0.59,-0.66 0.73,0.66
电池焊盘 [mm]
  round 2 hole 1.2 paste+0 mask+0.051: 1(0,0)

## Free pads (board coordinates)
  round 137.8 hole 98.43: 1(3324.79,3104.45) 1(3324.79,5100.31) 1(4311.87,3104.45) 1(4311.87,5100.31) 1(4682.11,3104.45) 1(4682.11,5100.31) 1(6536.64,3104.45) 1(6536.64,5100.31)

## Via types
v1: diameter 24.02, hole 12, Top Layer to Bottom Layer, 369 vias

## Nets (pads, with @x,y where several pads share a name; then routed paths per layer and width w, separated by ;. In a path a pad name is that pad's centre, name@x,y a point inside that pad or via, vN(x,y) a via of type N, cw(c..) or ccw(c..) an arc to the next point about the centre after c; other vN are vias at no path point)
$1N61: CN1.3 L1.3 R7.1 R10.2 TA.1 U7.2 | length 651.2
  Bottom Layer w10: CN1.3@6428.96,4649.72 6479.28,4700.04 6555.65,4700.04 TA.1@6559.15,4703.55
  Bottom Layer w15: L1.3@6044.76,4577.93 6045.49,4577.19 6046.23,4577.93 6062.87,4577.93 6071.76,4586.82 6071.76,4592.93 ; R10.2@6068.24,4670.04 6071.76,4670.04 6071.76,4592.93 ; CN1.3@6428.96,4649.72 6364.56,4649.72 6323.06,4608.23 U7.2@6266.32,4608.23 6198.06,4608.23 6189.36,4599.53 R7.1@6147.86,4599.53 6142.37,4594.04 6072.87,4594.04 6071.76,4592.93
$1N69: R3.1 U1.4 U4.2 U4.3 | length 589.8
  Bottom Layer w15: U4.2@5529.15,4537.33 5601.8,4537.33 5602.87,4536.26 ; U4.3@5529.15,4587.33 5602.87,4587.33 ; R3.1@5529.24,4378.04 5591.87,4378.04 5602.87,4389.04 5602.87,4536.26 ; U1.4@5561.66,4716.64 5594.27,4716.64 5602.87,4708.04 5602.87,4587.33 ; 5602.87,4536.26 5602.87,4587.33
$1N71: CN1.2 L1.4 R4.1 R7.2 TB.1 U3.2 | length 649.2
  Bottom Layer w10: CN1.2@6428.96,4449.72 6483.23,4503.99 TB.1@6559.15,4503.99
  Bottom Layer w15: L1.4@6044.78,4546.4 6062.51,4546.4 6068.51,4540.4 6068.51,4520.79 ; R4.1@6068.24,4460.04 6068.24,4471.29 6068.51,4471.56 6068.51,4520.79 ; CN1.2@6428.96,4449.72 6370.19,4449.72 6309.83,4510.08 U3.2@6266.48,4510.08 6260.52,4516.04 6197.87,4516.04 6193.12,4520.79 R7.2@6147.86,4520.79 6068.51,4520.79
$1N81: R1.2 U2.4 | length 81.3
  Bottom Layer w15: U2.4@6121.89,3716.1 6123.15,3714.84 R1.2@6202.62,3714.84
$1N82: R8.2 U5.4 | length 80.8
  Bottom Layer w15: U5.4@6121.89,3985.15 6202.53,3985.15 R8.2@6202.62,3985.25
$1N83: CN2.2 D1.2 R1.1 TDATA.1 | length 359.3
  Bottom Layer w10: CN2.2@6428.96,3759.01 6485.86,3815.92 TDATA.1@6559.15,3815.92
  Bottom Layer w15: R1.1@6289.36,3714.84 6290.6,3716.08 D1.2@6290.6,3811.97 ; R1.1@6310.36,3714.84 6324.68,3714.84 6368.85,3759.01 CN2.2@6399.96,3759.01
$1N88: U4.1 U6.1 | length 106.1
  Bottom Layer w10: U6.1@5438.96,4507.16 5438.96,4493.95 5444.87,4488.04 5528.44,4488.04 U4.1@5529.15,4487.33
$1N92: U4.4 U6.8 | length 120.3
  Bottom Layer w10: U6.8@5438.96,4629.21 5438.96,4649.12 5445.37,4655.54 5458.87,4655.54 5477.08,4637.33 U4.4@5529.15,4637.33
$1N94: CN2.3 D1.1 R8.1 TCLK.1 | length 404
  Bottom Layer w10: CN2.3@6428.96,3959.01 6485.68,4015.73 TCLK.1@6559.15,4015.73
  Bottom Layer w15: D1.1@6290.6,3886.77 6290.6,3984.02 R8.1@6289.36,3985.25 6331.66,3985.25 6358.87,3958.04 6427.99,3958.04 CN2.3@6428.96,3959.01
$1N98: R6.2 U4.7 | length 94.5
  Bottom Layer w15: U4.7@5731.51,4537.33 5777.58,4537.33 5788.87,4526.04 R6.2@5821.35,4526.04
$1N99: R9.2 U4.6 | length 96.9
  Bottom Layer w15: U4.6@5731.51,4587.33 5771.17,4587.33 5788.16,4604.33 R9.2@5821.36,4604.33
$1N105: LED1.1 R12.1 | length 128.3
  Bottom Layer w15: LED1.1@3279.83,4539.84 3407.23,4539.84 R12.1@3407.87,4539.2
$1N108: L1.1 R6.1 | length 82.2
  Bottom Layer w15: R6.1@5900.1,4526.02 5904.12,4530.04 5926.87,4530.04 5943.3,4546.46 L1.1@5973.85,4546.46
$1N109: L1.2 R9.1 | length 84.8
  Bottom Layer w15: R9.1@5900.1,4604.33 5926.58,4604.33 5953.01,4577.9 L1.2@5973.91,4577.9
$1N111: LED2.1 R22.1 | length 120.6
  Bottom Layer w15: R22.1@6447.24,3268.04 6566.75,3268.04 LED2.1@6567.51,3267.28
$1N113: LED3.1 R23.1 | length 250.2
  Bottom Layer w15: R23.1@6405.87,4949.41 6468.5,4949.41 6483.87,4934.04 6483.87,4862.04 6508.37,4837.54 LED3.1@6567.51,4837.54
$1N120: R20.2 U8.26 | length 394.7
  Bottom Layer w15: R20.2@5749.24,4376.98 5749.87,4376.35 5749.87,4224.04 5791.04,4182.87 U8.26@5791.04,3999.6
$1N121: R19.2 U8.16 | length 358.9
  Top Layer w15: v1(5290.02,4180.04) 5290.46,4179.6 v1(5290.46,3936.11)
  Bottom Layer w15: v1(5290.02,4180.04) 5290.02,4227.19 R19.2@5291.5,4228.67 ; v1(5290.46,3936.11) 5290.46,3942.98 5289.71,3943.74 5289.71,3999.45 U8.16@5291.04,4000.78
$1N139: R52.1 U17.B5 | length 194.2
  Top Layer w10: U17.B5@3328.76,4033.44 3452.92,4033.44 v1(3472.87,4013.49)
  Bottom Layer w10: v1(3472.87,4013.49) 3513.95,4013.49 R52.1@3514.5,4014.04
$1N140: R13.1 U17.A5 | length 243.2
  Top Layer w10: U17.A5@3324.76,4151.55 3420.38,4151.55 3469.87,4201.04 v1(3469.87,4234.04)
  Bottom Layer w10: v1(3469.87,4234.04) R13.1@3514.5,4234.04
$1N151: R54.1 U22.8 | length 124.4
  Bottom Layer w11: U22.8@3720.07,3710.51 3747.4,3710.51 3763.24,3694.67 R54.1@3763.24,3620.04
$2N5: Q3.3 U15.2 | length 943.5
  Bottom Layer w15: U15.2@4069.6,5121.77 4067.87,5120.04 4067.87,5025.04 4088.87,5004.04 4746.87,5004.04 4768.87,4982.04 4768.87,4856.04 Q3.3@4769.72,4855.19
$2N7: Q3.2 R44.2 | length 69.3
  Bottom Layer w15: Q3.2@4848.46,4817.79 4849.21,4817.04 R44.2@4917.41,4817.04
$2N9: Q3.1 R41.2 | length 69.3
  Bottom Layer w15: Q3.1@4848.46,4892.59 4916.64,4892.59 R41.2@4917.41,4893.35
$2N39: U11.3
$2N53: Q2.3 R30.2 | length 152.8
  Bottom Layer w15: R30.2@4881.24,4410.04 4883.87,4412.67 Q2.3@4883.87,4561.71
$2N57: Q2.1 R25.1 R28.2 | length 141.6
  Bottom Layer w15: Q2.1@4921.27,4482.97 4922.2,4482.04 R25.1@4986.5,4482.04 R28.2@4986.5,4406.04
$2N64: R31.1 R32.2 U12.5 | length 490.6
  Bottom Layer w15: U12.5@4091.38,4083.69 4292.89,4083.69 4307.89,4068.69 4307.89,3931.35 4299.26,3922.72 R31.1@4259.89,3922.72 R32.2@4180.89,3922.72
$2N65: L2.1 U12.6 | length 138.6
  Bottom Layer w15: U12.6@4091.38,4046.29 4119.63,4046.29 4143.22,4022.7 L2.1@4220.23,4022.7
$2N66: C16.2 Q1.3 R29.2 U12.3 | length 279.2
  Bottom Layer w15: Q1.3@3927.55,4045.69 3927.55,4097.01 3951.63,4121.09 U12.3@3985.08,4121.09 3985.08,4134.25 4012.86,4162.03 R29.2@4012.86,4191.69 4012.86,4263.4 C16.2@4017.5,4268.04
$2N70: C17.1 C18.1 L2.2 R29.1 R31.2 SW2.2 U12.4 | length 2155.6
  Top Layer w25: SW2.2@3207.87,3495.02 3243.23,3495.02 3384.24,3636.04 4205.87,3636.04 4311.87,3742.04 v1(4311.87,4212.04) v1(4311.87,4240.04)
  Bottom Layer w10: L2.2@4220.23,4148.68 4307.55,4148.68 4327.89,4128.35 4327.89,3873.35 4298.52,3843.98 R31.2@4259.89,3843.98
$2N73: R47.1 U16.4 | length 143.1
  Bottom Layer w10: R47.1@3497.14,3272.64 3497.14,3307.27 3509.14,3319.27 3532.49,3319.27 3554.49,3341.27 U16.4@3554.49,3378.26
$2N76: R45.1 U16.3 | length 105.8
  Bottom Layer w10: R45.1@3573.8,3272.64 3573.8,3377.88 U16.3@3574.18,3378.26
$2N77: L3.2 U16.1 | length 421.4
  Top Layer w20: v1(3439.14,3291.28) 3645.12,3291.28 3663.14,3309.3 v1(3663.14,3349.28)
  Bottom Layer w11: U16.1@3613.55,3378.26 3613.55,3358.87 3623.14,3349.28 v1(3663.14,3349.28)
  Bottom Layer w20: v1(3439.14,3291.28) L3.2@3439.14,3368.28